# Altium PCB 01_UNROUTED_PLACEMENT.PcbDoc (part 2 of 4)
Units mil, origin at the board's own origin, x right, y up, seen from the top; angles counter-clockwise.
Board outline 3149.61 x 1771.65 mil, 4 copper layers (L1 TOP, L2 GND, L3 POWER SIGNAL, L4 BOTTOM GND), stack 45.835 mil thick; 209 components, 132 nets, 746 pads, 5 vias.
Unrouted connection lines stored in the file: 533.
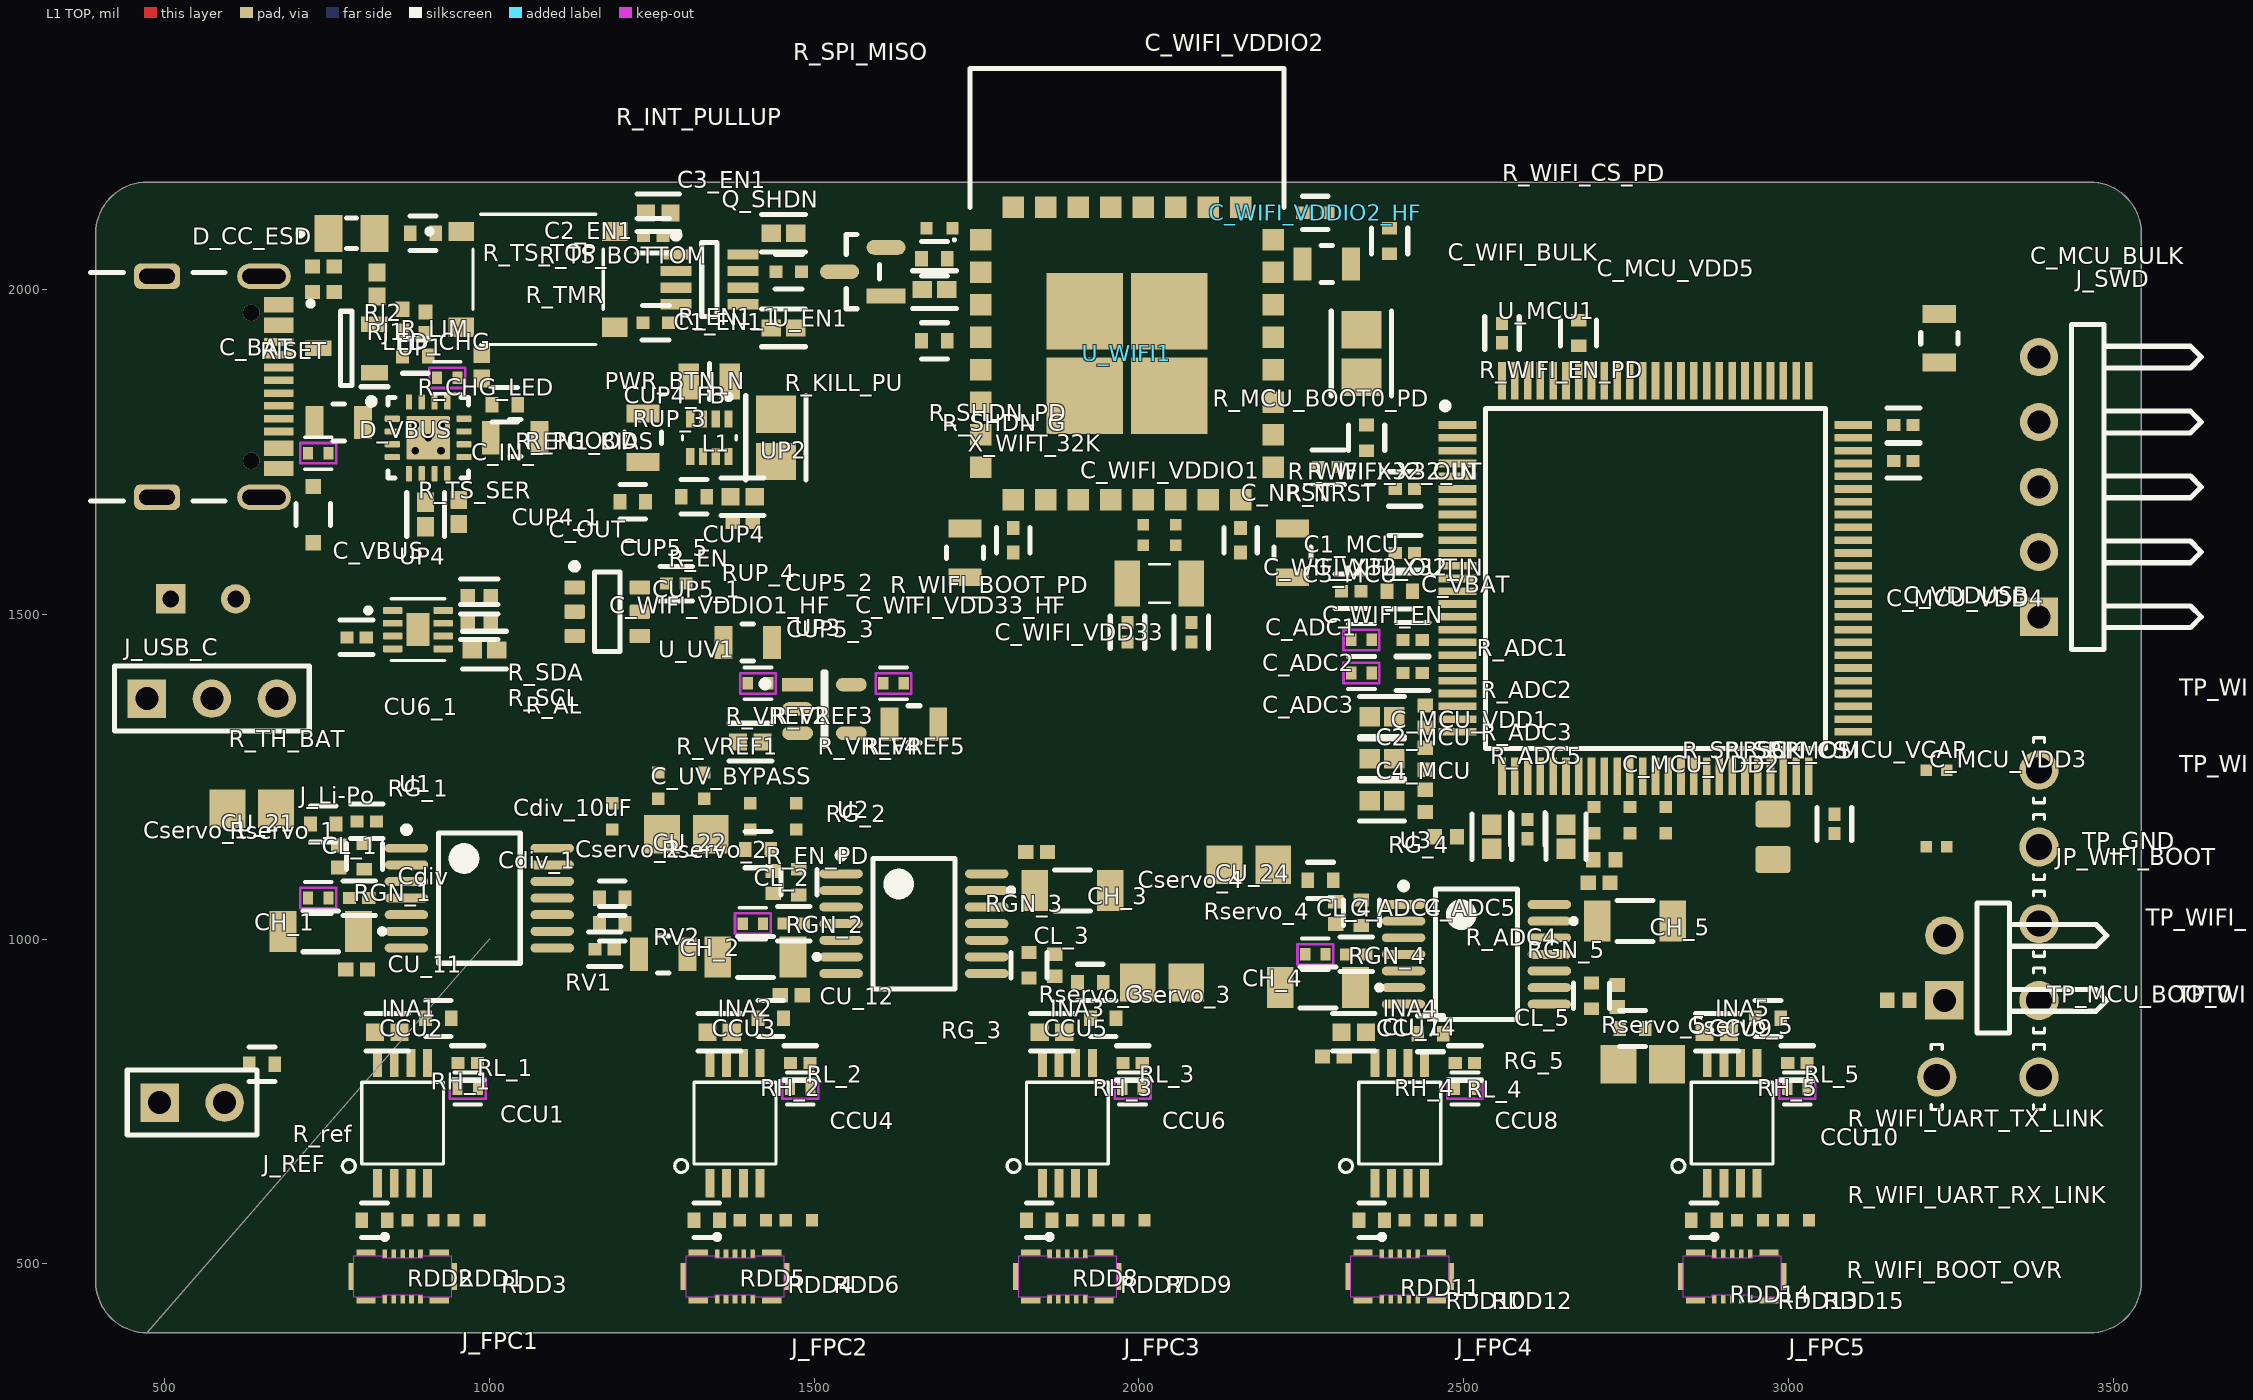
[diagram p0: L1 TOP view]

## Part data (continued)
CCU3: library part EMG_R5_CCU3, "Murata GRM155C71C105KE11D: 1 uF 16 V X7S +/-10%, 0402/1005 metric", Capacitance="1 uF", Dielectric=X7S, Manufacturer=Murata, Manufacturer Part Number=GRM155C71C105KE11D, Package="0402 / 1005 metric", Tolerance=+/-10%, Voltage Rating="16 V", Check_prices=https://www.snapeda.com/parts/GRM155C71C105KE11D/Murata/view-part/?ref=eda, Controlled Revision="R5 2026-09-16; project-local frozen symbol/footprint", MF=Murata, MP=GRM155C71C105KE11D, SnapEDA_Link=https://www.snapeda.com/parts/GRM155C71C105KE11D/Murata/view-part/?ref=snap
CCU4: library part EMG_R5_CCU4, "CAP CER 0.1UF 16V X5R 0402", Capacitance=100nF, Case Code (Imperial)=0402, Case Code (Metric)=1005, Dielectric=X5R, Max Operating Temperature=85°C, Min Operating Temperature=-55°C, Package Quantity=1, Tolerance=10%, Voltage=16V, Case/Package=0402, Construction=Flat, Controlled Revision="R5 2026-09-16; project-local frozen symbol/footprint", Depth=0.5mm, Height=0.5mm, Lead Free="Lead Free", Length=1mm, Mount="Surface Mount", Packaging="Tape and Reel", Radiation Hardening=No, REACH SVHC="No SVHC", RoHS Compliant=Yes, Series=GRM, Size=0.5mm, Termination=SMD/SMT, Thickness=0.022inch, Voltage Rating=16V, Voltage Rating (DC)=16V, Width=0.02inch
CCU5: library part EMG_R5_CCU5, "Murata GRM155C71C105KE11D: 1 uF 16 V X7S +/-10%, 0402/1005 metric", Capacitance="1 uF", Dielectric=X7S, Manufacturer=Murata, Manufacturer Part Number=GRM155C71C105KE11D, Package="0402 / 1005 metric", Tolerance=+/-10%, Voltage Rating="16 V", Check_prices=https://www.snapeda.com/parts/GRM155C71C105KE11D/Murata/view-part/?ref=eda, Controlled Revision="R5 2026-09-16; project-local frozen symbol/footprint", MF=Murata, MP=GRM155C71C105KE11D, SnapEDA_Link=https://www.snapeda.com/parts/GRM155C71C105KE11D/Murata/view-part/?ref=snap
CCU6: library part EMG_R5_CCU6, "CAP CER 0.1UF 16V X5R 0402", Capacitance=100nF, Case Code (Imperial)=0402, Case Code (Metric)=1005, Dielectric=X5R, Max Operating Temperature=85°C, Min Operating Temperature=-55°C, Package Quantity=1, Tolerance=10%, Voltage=16V, Case/Package=0402, Construction=Flat, Controlled Revision="R5 2026-09-16; project-local frozen symbol/footprint", Depth=0.5mm, Height=0.5mm, Lead Free="Lead Free", Length=1mm, Mount="Surface Mount", Packaging="Tape and Reel", Radiation Hardening=No, REACH SVHC="No SVHC", RoHS Compliant=Yes, Series=GRM, Size=0.5mm, Termination=SMD/SMT, Thickness=0.022inch, Voltage Rating=16V, Voltage Rating (DC)=16V, Width=0.02inch
CCU7: library part EMG_R5_CCU7, "Murata GRM155C71C105KE11D: 1 uF 16 V X7S +/-10%, 0402/1005 metric", Capacitance="1 uF", Dielectric=X7S, Manufacturer=Murata, Manufacturer Part Number=GRM155C71C105KE11D, Package="0402 / 1005 metric", Tolerance=+/-10%, Voltage Rating="16 V", Check_prices=https://www.snapeda.com/parts/GRM155C71C105KE11D/Murata/view-part/?ref=eda, Controlled Revision="R5 2026-09-16; project-local frozen symbol/footprint", MF=Murata, MP=GRM155C71C105KE11D, SnapEDA_Link=https://www.snapeda.com/parts/GRM155C71C105KE11D/Murata/view-part/?ref=snap
CCU8: library part EMG_R5_CCU8, "CAP CER 0.1UF 16V X5R 0402", Capacitance=100nF, Case Code (Imperial)=0402, Case Code (Metric)=1005, Dielectric=X5R, Max Operating Temperature=85°C, Min Operating Temperature=-55°C, Package Quantity=1, Tolerance=10%, Voltage=16V, Case/Package=0402, Construction=Flat, Controlled Revision="R5 2026-09-16; project-local frozen symbol/footprint", Depth=0.5mm, Height=0.5mm, Lead Free="Lead Free", Length=1mm, Mount="Surface Mount", Packaging="Tape and Reel", Radiation Hardening=No, REACH SVHC="No SVHC", RoHS Compliant=Yes, Series=GRM, Size=0.5mm, Termination=SMD/SMT, Thickness=0.022inch, Voltage Rating=16V, Voltage Rating (DC)=16V, Width=0.02inch
CCU9: library part EMG_R5_CCU9, "Murata GRM155C71C105KE11D: 1 uF 16 V X7S +/-10%, 0402/1005 metric", Capacitance="1 uF", Dielectric=X7S, Manufacturer=Murata, Manufacturer Part Number=GRM155C71C105KE11D, Package="0402 / 1005 metric", Tolerance=+/-10%, Voltage Rating="16 V", Check_prices=https://www.snapeda.com/parts/GRM155C71C105KE11D/Murata/view-part/?ref=eda, Controlled Revision="R5 2026-09-16; project-local frozen symbol/footprint", MF=Murata, MP=GRM155C71C105KE11D, SnapEDA_Link=https://www.snapeda.com/parts/GRM155C71C105KE11D/Murata/view-part/?ref=snap
CCU10: library part EMG_R5_CCU10, "CAP CER 0.1UF 16V X5R 0402", Capacitance=100nF, Case Code (Imperial)=0402, Case Code (Metric)=1005, Dielectric=X5R, Max Operating Temperature=85°C, Min Operating Temperature=-55°C, Package Quantity=1, Tolerance=10%, Voltage=16V, Case/Package=0402, Construction=Flat, Controlled Revision="R5 2026-09-16; project-local frozen symbol/footprint", Depth=0.5mm, Height=0.5mm, Lead Free="Lead Free", Length=1mm, Mount="Surface Mount", Packaging="Tape and Reel", Radiation Hardening=No, REACH SVHC="No SVHC", RoHS Compliant=Yes, Series=GRM, Size=0.5mm, Termination=SMD/SMT, Thickness=0.022inch, Voltage Rating=16V, Voltage Rating (DC)=16V, Width=0.02inch
Cdiv: library part EMG_R5_Cdiv, "CAP CER 0.1UF 16V X5R 0402", Capacitance=100nF, Case Code (Imperial)=0402, Case Code (Metric)=1005, Dielectric=X5R, Max Operating Temperature=85°C, Min Operating Temperature=-55°C, Package Quantity=1, Tolerance=10%, Voltage=16V, Case/Package=0402, Construction=Flat, Controlled Revision="R5 2026-09-16; project-local frozen symbol/footprint", Depth=0.5mm, Height=0.5mm, Lead Free="Lead Free", Length=1mm, Mount="Surface Mount", Packaging="Tape and Reel", Radiation Hardening=No, REACH SVHC="No SVHC", RoHS Compliant=Yes, Series=GRM, Size=0.5mm, Termination=SMD/SMT, Thickness=0.022inch, Voltage Rating=16V, Voltage Rating (DC)=16V, Width=0.02inch
Cdiv_1: library part EMG_R5_Cdiv_1, "CAP CER 0.1UF 16V X5R 0402", Capacitance=100nF, Case Code (Imperial)=0402, Case Code (Metric)=1005, Dielectric=X5R, Max Operating Temperature=85°C, Min Operating Temperature=-55°C, Package Quantity=1, Tolerance=10%, Voltage=16V, Case/Package=0402, Construction=Flat, Controlled Revision="R5 2026-09-16; project-local frozen symbol/footprint", Depth=0.5mm, Height=0.5mm, Lead Free="Lead Free", Length=1mm, Mount="Surface Mount", Packaging="Tape and Reel", Radiation Hardening=No, REACH SVHC="No SVHC", RoHS Compliant=Yes, Series=GRM, Size=0.5mm, Termination=SMD/SMT, Thickness=0.022inch, Voltage Rating=16V, Voltage Rating (DC)=16V, Width=0.02inch
Cdiv_10uF: library part EMG_R5_Cdiv_10uF, "10 µF ±10% 25V Ceramic Capacitor X7S 0805 (2012 Metric)", Controlled Revision="R5 2026-09-16; project-local frozen symbol/footprint"
CH_1: library part EMG_R5_CH_1, "SMD capacitor C0G(EIA) with capacitance 3900pF Tol.2%. Rated voltage 50Vdc 125C", Package="1005-2 Murata", Check_prices=https://www.snapeda.com/parts/GRM1555C1H392GE01D/Murata/view-part/?ref=eda, Controlled Revision="R5 2026-09-16; project-local frozen symbol/footprint", MF="Murata Electronics", MP=GRM1555C1H392GE01D, SnapEDA_Link=https://www.snapeda.com/parts/GRM1555C1H392GE01D/Murata/view-part/?ref=snap
CH_2: library part EMG_R5_CH_2, "SMD capacitor C0G(EIA) with capacitance 3900pF Tol.2%. Rated voltage 50Vdc 125C", Package="1005-2 Murata", Check_prices=https://www.snapeda.com/parts/GRM1555C1H392GE01D/Murata/view-part/?ref=eda, Controlled Revision="R5 2026-09-16; project-local frozen symbol/footprint", MF="Murata Electronics", MP=GRM1555C1H392GE01D, SnapEDA_Link=https://www.snapeda.com/parts/GRM1555C1H392GE01D/Murata/view-part/?ref=snap
CH_3: library part EMG_R5_CH_3, "SMD capacitor C0G(EIA) with capacitance 3900pF Tol.2%. Rated voltage 50Vdc 125C", Package="1005-2 Murata", Check_prices=https://www.snapeda.com/parts/GRM1555C1H392GE01D/Murata/view-part/?ref=eda, Controlled Revision="R5 2026-09-16; project-local frozen symbol/footprint", MF="Murata Electronics", MP=GRM1555C1H392GE01D, SnapEDA_Link=https://www.snapeda.com/parts/GRM1555C1H392GE01D/Murata/view-part/?ref=snap
CH_4: library part EMG_R5_CH_4, "SMD capacitor C0G(EIA) with capacitance 3900pF Tol.2%. Rated voltage 50Vdc 125C", Package="1005-2 Murata", Check_prices=https://www.snapeda.com/parts/GRM1555C1H392GE01D/Murata/view-part/?ref=eda, Controlled Revision="R5 2026-09-16; project-local frozen symbol/footprint", MF="Murata Electronics", MP=GRM1555C1H392GE01D, SnapEDA_Link=https://www.snapeda.com/parts/GRM1555C1H392GE01D/Murata/view-part/?ref=snap
CH_5: library part EMG_R5_CH_5, "SMD capacitor C0G(EIA) with capacitance 3900pF Tol.2%. Rated voltage 50Vdc 125C", Package="1005-2 Murata", Check_prices=https://www.snapeda.com/parts/GRM1555C1H392GE01D/Murata/view-part/?ref=eda, Controlled Revision="R5 2026-09-16; project-local frozen symbol/footprint", MF="Murata Electronics", MP=GRM1555C1H392GE01D, SnapEDA_Link=https://www.snapeda.com/parts/GRM1555C1H392GE01D/Murata/view-part/?ref=snap
CL_1: library part EMG_R5_CL_1, Manufacturer=Murata, Controlled Revision="R5 2026-09-16; project-local frozen symbol/footprint", Part Number=GRM21BR71C824KA01L
CL_2: library part EMG_R5_CL_2, Manufacturer=Murata, Controlled Revision="R5 2026-09-16; project-local frozen symbol/footprint", Part Number=GRM21BR71C824KA01L
CL_3: library part EMG_R5_CL_3, Manufacturer=Murata, Controlled Revision="R5 2026-09-16; project-local frozen symbol/footprint", Part Number=GRM21BR71C824KA01L
CL_4: library part EMG_R5_CL_4, Manufacturer=Murata, Controlled Revision="R5 2026-09-16; project-local frozen symbol/footprint", Part Number=GRM21BR71C824KA01L
CL_5: library part EMG_R5_CL_5, Manufacturer=Murata, Controlled Revision="R5 2026-09-16; project-local frozen symbol/footprint", Part Number=GRM21BR71C824KA01L
Cservo_1: library part EMG_R5_Cservo_1, "Capacitor", Capacitance="3.3 uF", Dielectric=X7R, Manufacturer=Murata, Manufacturer_Name="Murata Electronics", Mouser Part Number=81-GRM31CR71E335KA8L, Package="1206 / 3216 metric", Tolerance=+/-10%, Voltage Rating="25 V", Arrow Part Number=GRM31CR71E335KA88L, Arrow Price/Stock=https://www.arrow.com/en/products/grm31cr71e335ka88l/murata-manufacturing?region=europe, Controlled Revision="R5 2026-09-16; project-local frozen symbol/footprint", Datasheet Link=https://search.murata.co.jp/Ceramy/image/img/A01X/G101/ENG/GRM31CR71E335KA88-01.pdf, Height="1.6 +/-0.2 mm", Manufacturer Part Number=GRM31CR71E335KA88L, Manufacturer_Part_Number=GRM31CR71E335KA88L, Mouser Price/Stock=https://www.mouser.co.uk/ProductDetail/Murata-Electronics/GRM31CR71E335KA88L?qs=O9nxk9bDVAjJxWOahKXrZA%3D%3D
Cservo_2: library part EMG_R5_Cservo_2, "Capacitor", Capacitance="3.3 uF", Dielectric=X7R, Manufacturer=Murata, Manufacturer_Name="Murata Electronics", Mouser Part Number=81-GRM31CR71E335KA8L, Package="1206 / 3216 metric", Tolerance=+/-10%, Voltage Rating="25 V", Arrow Part Number=GRM31CR71E335KA88L, Arrow Price/Stock=https://www.arrow.com/en/products/grm31cr71e335ka88l/murata-manufacturing?region=europe, Controlled Revision="R5 2026-09-16; project-local frozen symbol/footprint", Datasheet Link=https://search.murata.co.jp/Ceramy/image/img/A01X/G101/ENG/GRM31CR71E335KA88-01.pdf, Height="1.6 +/-0.2 mm", Manufacturer Part Number=GRM31CR71E335KA88L, Manufacturer_Part_Number=GRM31CR71E335KA88L, Mouser Price/Stock=https://www.mouser.co.uk/ProductDetail/Murata-Electronics/GRM31CR71E335KA88L?qs=O9nxk9bDVAjJxWOahKXrZA%3D%3D
Cservo_3: library part EMG_R5_Cservo_3, "Capacitor", Capacitance="3.3 uF", Dielectric=X7R, Manufacturer=Murata, Manufacturer_Name="Murata Electronics", Mouser Part Number=81-GRM31CR71E335KA8L, Package="1206 / 3216 metric", Tolerance=+/-10%, Voltage Rating="25 V", Arrow Part Number=GRM31CR71E335KA88L, Arrow Price/Stock=https://www.arrow.com/en/products/grm31cr71e335ka88l/murata-manufacturing?region=europe, Controlled Revision="R5 2026-09-16; project-local frozen symbol/footprint", Datasheet Link=https://search.murata.co.jp/Ceramy/image/img/A01X/G101/ENG/GRM31CR71E335KA88-01.pdf, Height="1.6 +/-0.2 mm", Manufacturer Part Number=GRM31CR71E335KA88L, Manufacturer_Part_Number=GRM31CR71E335KA88L, Mouser Price/Stock=https://www.mouser.co.uk/ProductDetail/Murata-Electronics/GRM31CR71E335KA88L?qs=O9nxk9bDVAjJxWOahKXrZA%3D%3D
Cservo_4: library part EMG_R5_Cservo_4, "Capacitor", Capacitance="3.3 uF", Dielectric=X7R, Manufacturer=Murata, Manufacturer_Name="Murata Electronics", Mouser Part Number=81-GRM31CR71E335KA8L, Package="1206 / 3216 metric", Tolerance=+/-10%, Voltage Rating="25 V", Arrow Part Number=GRM31CR71E335KA88L, Arrow Price/Stock=https://www.arrow.com/en/products/grm31cr71e335ka88l/murata-manufacturing?region=europe, Controlled Revision="R5 2026-09-16; project-local frozen symbol/footprint", Datasheet Link=https://search.murata.co.jp/Ceramy/image/img/A01X/G101/ENG/GRM31CR71E335KA88-01.pdf, Height="1.6 +/-0.2 mm", Manufacturer Part Number=GRM31CR71E335KA88L, Manufacturer_Part_Number=GRM31CR71E335KA88L, Mouser Price/Stock=https://www.mouser.co.uk/ProductDetail/Murata-Electronics/GRM31CR71E335KA88L?qs=O9nxk9bDVAjJxWOahKXrZA%3D%3D
Cservo_5: library part EMG_R5_Cservo_5, "Capacitor", Capacitance="3.3 uF", Dielectric=X7R, Manufacturer=Murata, Manufacturer_Name="Murata Electronics", Mouser Part Number=81-GRM31CR71E335KA8L, Package="1206 / 3216 metric", Tolerance=+/-10%, Voltage Rating="25 V", Arrow Part Number=GRM31CR71E335KA88L, Arrow Price/Stock=https://www.arrow.com/en/products/grm31cr71e335ka88l/murata-manufacturing?region=europe, Controlled Revision="R5 2026-09-16; project-local frozen symbol/footprint", Datasheet Link=https://search.murata.co.jp/Ceramy/image/img/A01X/G101/ENG/GRM31CR71E335KA88-01.pdf, Height="1.6 +/-0.2 mm", Manufacturer Part Number=GRM31CR71E335KA88L, Manufacturer_Part_Number=GRM31CR71E335KA88L, Mouser Price/Stock=https://www.mouser.co.uk/ProductDetail/Murata-Electronics/GRM31CR71E335KA88L?qs=O9nxk9bDVAjJxWOahKXrZA%3D%3D